# EAGLE board LoRaBaseStation1.2 Mk1 Schematic v55 (EAGLE 9.7.0)
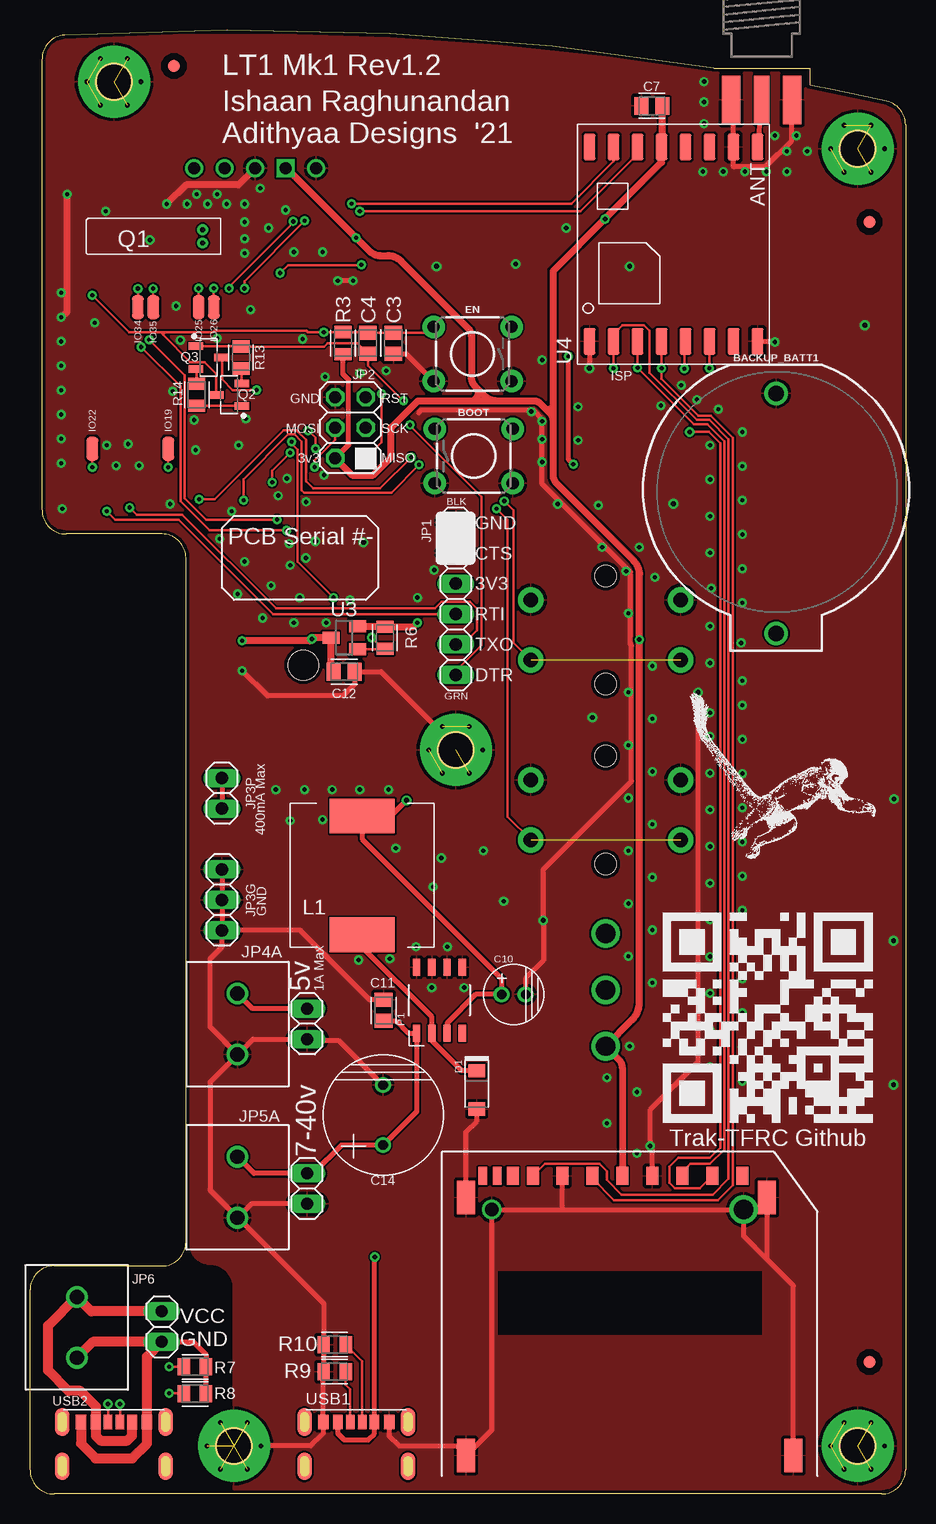
[diagram p0: board, top side]
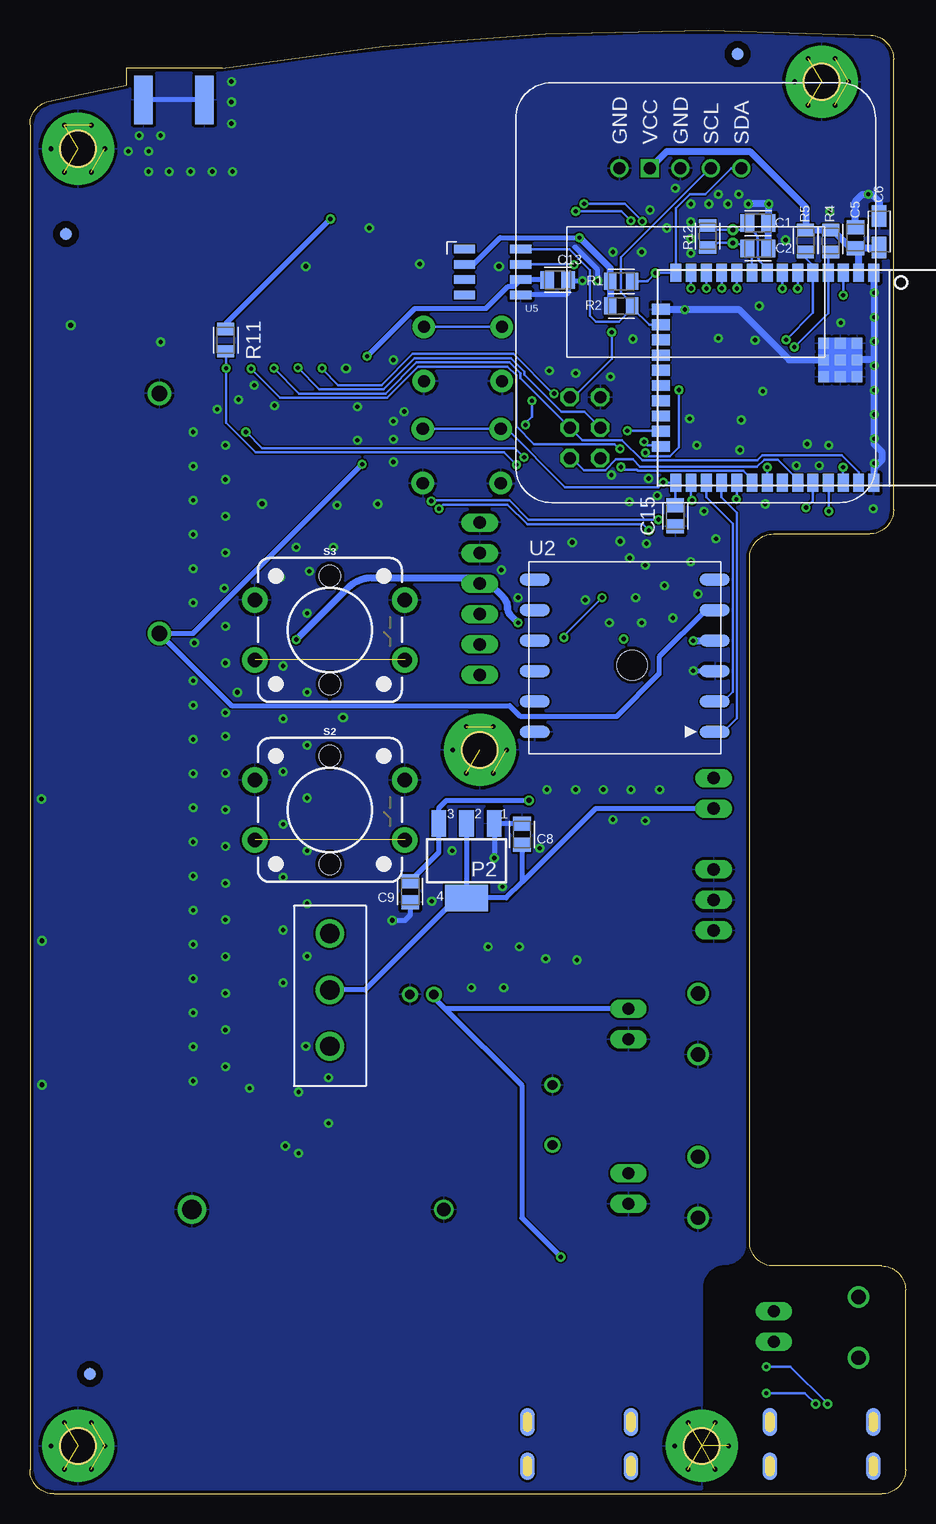
[diagram p1: board, bottom side, seen from below]

Size 73 x 122 mm. Coordinates in mm from the lower left corner, seen from the top.
Outline: 0,2 arc90 2,0 71,0 arc90 73,2 73,114.1 arc77 71.44,116.05 arc2 65,117.4 65,118.83 57,118.83 arc13 2.88,121.57 arc87 1,119.57 1,82 arc90 3,80 11,80 arc-90 13,78 13,21 arc-90 11,19 2,19 arc90 0,17 0,2
Outline: circle at 69,4 radius 1.5
Outline: circle at 17,4 radius 1.5
Outline: circle at 35.5,62 radius 1.5
Outline: circle at 69,112.1 radius 1.5
Outline: circle at 7,117.68 radius 1.5
Copper layers (1*16): Top 0.035mm / dielectric 1.5mm / Bottom 0.035mm
Design rules "PCBPower": minimum track width 6mil, minimum drill 0.35mm, track to track 6mil, track to pad 6mil, pad to pad 6mil, via to via 6mil, smd to smd 6mil, copper to edge 12mil, drill to drill 12mil, minimum pad ring 10mil, minimum via ring 8mil, stop-mask expansion 4mil, vias tented up to drill 0.4mm, thermal gap 10mil
Net classes: 1 Power: width 0.4 mm

## Footprints (pad centres in the part's own frame; a part is rotated, then mirrored left to right if it is on the bottom)
BATTCOM_20MM_PTH = drill 1.3: 1 11.85,0; 2 -8.15,0
TACTILE_SWITCH_PTH_6.0MM = drill 1.016 pad 1.88: 1 -3.251,2.261; 2 3.251,2.261; 3 -3.251,-2.261; 4 3.251,-2.261
CAPC2012X110 = smd 1.165 x 1.465: 1 -0.875,0; 2 0.875,0
CAPM3216X180 = smd 1.796 x 1.189: 1 -1.31,0; 2 1.31,0
CAP_2P_5X11 = drill 0.8: 1 -1,0; 2 1,0
CAP_5P_10X12.5 = drill 0.8: 1 -2.5,0; 2 2.5,0
SODFL3718X115 = smd 1.115 x 1.361: 1 -1.6,0; 2 1.6,0
FIDUCIAL_1MM = smd 1 x 1: 1 0,0
BREAKOUT_PAD*1*1X2MM = smd 2 x 1: P$1 0,0
1X06 = drill 1.016 long: 1 -6.35,0; 2 -3.81,0; 3 -1.27,0; 4 1.27,0; 5 3.81,0; 6 6.35,0
2X03 = drill 1.016 octagon: 1 -2.54,-1.27; 2 -2.54,1.27; 3 0,-1.27; 4 0,1.27; 5 2.54,-1.27; 6 2.54,1.27
1X03 = drill 1.016 long: 1 -2.54,0; 2 0,0; 3 2.54,0
1X02 = drill 1.016 long: 1 -1.27,0; 2 1.27,0
TERMBLK_508-2N = drill 1.2: 1 0,0; 2 5.08,0
INDUCTOR_12X12MM = smd 5.4 x 2.9: P$1 0,4.95; P$2 0,-4.95
MOUNTING_HOLE_3MM = drill 3 pad 6: P1 0,0 | drill 0.4: P2 2.25,0; P3 1.125,-1.948; P4 1.125,1.948; P5 -1.124,-1.948; P6 -2.248,0; P7 -1.124,1.948
OLED_0.96_I2C(NOMOUNT) = drill 1: P1 -1.27,4.87; P3 1.27,4.87; P4 3.81,4.87; P9 -6.35,4.87 | drill 1 square: P2 -3.81,4.87
XL1509_SOIC8 = smd 1.4 x 0.6: P1 -2.75,1.905; P2 -2.75,0.635; P3 -2.75,-0.635; P4 -2.75,-1.905; P5 2.75,-1.905; P6 2.75,-0.635; P7 2.75,0.635; P8 2.75,1.905
SOT223 = smd 1.219 x 2.235: 1 -2.311,-3.099; 2 0,-3.099; 3 2.311,-3.099 | smd 3.6 x 2.2: 4 0,3.099
YT-38(RTC_CRYSTAL) = drill 0.4 pad 0.813: 1 0,-0.55; 2 0,0.55
SOT95P237X112-3N = smd 1.224 x 0.625: 1 -1.064,0.95; 2 -1.064,-0.95; 3 1.064,0
RESC2012X65 = smd 1.031 x 1.42: 1 -0.919,0; 2 0.919,0
1P2T_SLIDE_SWITCH = drill 1.6: P1 0,4.7; P2 0,0; P3 0,-4.7
TACTILE_SWITCH_PTH_12MM = drill 1.2 pad 2.159: 1 6.25,-2.5; 2 -6.25,-2.5; 3 6.25,2.5; 4 -6.25,2.5 | hole 1.8: 0,4.5; 0,-4.5
SD_CARD_SOCKET-794212 = smd 0.7 x 1.5: CD -11.05,0; WP -12.25,0 | smd 1 x 1.5: P1 6.875,0; P2 4.375,0; P3 1.875,0; P4 -0.625,0; P5 -3.125,0; P6 -5.625,0; P7 -8.05,0; P8 -9.75,0; P9 9.375,0 | smd 1.5 x 2.8: P12 -13.65,-23.3; P15 11.45,-1.8; P16 -13.65,-1.8; P17 13.65,-23.3 | drill 1.6 pad 2: P13 9.5,-2.8 | drill 1.1 pad 1.5: P14 -11.5,-2.8
SMA_EDGELAUNCH = smd 4.064 x 1.524: GND@1 2.032,-2.54; GND@2 2.032,2.54 | smd 4.064 x 1.524 bottom: GND@3 2.032,2.54; GND@4 2.032,-2.54 | smd 4.064 x 1.27: P 2.032,0
ESP32-WROOM-32E = smd 1.5 x 0.9: P1 -8.75,5.26; P2 -8.75,3.99; P3 -8.75,2.72; P4 -8.75,1.45; P5 -8.75,0.18; P6 -8.75,-1.09; P7 -8.75,-2.36; P8 -8.75,-3.63; P9 -8.75,-4.9; P10 -8.75,-6.17; P11 -8.75,-7.44; P12 -8.75,-8.71; P13 -8.75,-9.98; P14 -8.75,-11.25; P25 8.75,-11.25; P26 8.75,-9.98; P27 8.75,-8.71; P28 8.75,-7.44; P29 8.75,-6.17; P30 8.75,-4.9; P31 8.75,-3.63; P32 8.75,-2.36; P33 8.75,-1.09; P34 8.75,0.18; P35 8.75,1.45; P36 8.75,2.72; P37 8.75,3.99; P38 8.75,5.26 | smd 0.9 x 1.5: P15 -5.715,-12.5; P16 -4.445,-12.5; P17 -3.175,-12.5; P18 -1.905,-12.5; P19 -0.635,-12.5; P20 0.635,-12.5; P21 1.905,-12.5; P22 3.175,-12.5; P23 4.445,-12.5; P24 5.715,-12.5 | smd 0.9 x 0.9: P39 -2.9,3.86; P40 -1.5,3.86; P41 -0.1,3.86; P42 -2.9,2.46; P43 -1.5,2.46; P44 -0.1,2.46; P45 -2.9,1.06; P46 -1.5,1.06; P47 -0.1,1.06
L80_PACKAGE = smd 2.5 x 1: 1 15.5,1.8; 2 15.5,4.34; 3 15.5,6.88; 4 15.5,9.42; 5 15.5,11.96; 6 15.5,14.5; 7 0.5,14.5; 8 0.5,11.96; 9 0.5,9.42; 10 0.5,6.88; 11 0.5,4.34; 12 0.5,1.8 | hole 2.5: 8.6,7.37
SOT23 = smd 1 x 1.4: 1 -0.95,-1.1; 2 0.95,-1.1; 3 0,1.1
LORA_RFM95W-915S2_16MODULE = smd 2.2 x 1: P1 -8.1,7; P2 -8.1,5; P3 -8.1,3; P4 -8.1,1; P5 -8.1,-1; P6 -8.1,-3; P7 -8.1,-5; P8 -8.1,-7; P9 8.1,-7; P10 8.1,-5; P11 8.1,-3; P12 8.1,-1; P13 8.1,1; P14 8.1,3; P15 8.1,5; P16 8.1,7
DS3231MZ+_SOIC8 = smd 1.78 x 0.72: P1 -2.34,1.905; P2 -2.34,0.635; P3 -2.34,-0.635; P4 -2.34,-1.905; P5 2.34,-1.905; P6 2.34,-0.635; P7 2.34,0.635; P8 2.34,1.905
USB-C_POWER_SUN5463 = smd 0.7 x 1.2: CC1 -0.5,0; CC2 0.5,0 | smd 0.9 x 1.2: GND1 -2.75,0; GND2 2.75,0 | smd 1.2 x 2.3 bottom: P1 4.32,0; P2 4.32,-3.7; P3 -4.32,0; P4 -4.32,-3.7 | smd 1.2 x 2.3: P5 4.32,0; P6 4.32,-3.7; P7 -4.32,0; P8 -4.32,-3.7 | smd 0.8 x 1.2: VBUS1 -1.52,0; VBUS2 1.52,0

## Placement (x,y rotation side)
A1  [SQUIRREL_MONKE]  63.18,57.21 0 top
BACKUP_BATT1  [BATTCOM_20MM_PTH]  62.21,83.57 270 top
BOOT  MOMENTARY-SWITCH-SPST-PTH-6.0MM  [TACTILE_SWITCH_PTH_6.0MM]  37,86.5 0 top
C1  15pF  [CAPC2012X110]  12.3,105.9 180 bottom
C2  15pF  [CAPC2012X110]  12.3,103.8 180 bottom
C3  0.1uF  [CAPC2012X110]  30.3,95.9 270 top
C4  0.1uF  [CAPC2012X110]  28.18,95.9 270 top
C5  0.1uF  [CAPC2012X110]  4.18,104.7 90 bottom
C6  10uF  [CAPM3216X180]  2.2,105.2 90 bottom
C7  0.1uF  [CAPC2012X110]  51.85,115.68 180 top
C8  10uF  [CAPC2012X110]  31.98,54.96 270 bottom
C9  10uF  [CAPC2012X110]  41.3,50.2 270 bottom
C10  100uF  [CAP_2P_5X11]  40.32,41.63 0 top
C11  1uF  [CAPC2012X110]  29.48,40.3 90 top
C12  1uF  [CAPC2012X110]  26.2,68.52 0 top
C13  1uF  [CAPC2012X110]  29,101.17 0 bottom
C14  470uF  [CAP_5P_10X12.5]  29.44,31.58 90 top
C15  0.1uF  [CAPC2012X110]  19.2,81.5 90 bottom
D1  [SODFL3718X115]  37.25,33.67 270 top
EN  MOMENTARY-SWITCH-SPST-PTH-6.0MM  [TACTILE_SWITCH_PTH_6.0MM]  36.9,95 180 top
F1  FIDUCIAL  [FIDUCIAL_1MM]  12,119 0 top
F2  FIDUCIAL  [FIDUCIAL_1MM]  70,106 0 top
F3  FIDUCIAL  [FIDUCIAL_1MM]  70,11 0 top
F4  FIDUCIAL  [FIDUCIAL_1MM]  68,10 0 bottom
F5  FIDUCIAL  [FIDUCIAL_1MM]  14,120 0 bottom
F6  FIDUCIAL  [FIDUCIAL_1MM]  70,105 0 bottom
IO19  BREAKOUT_PADL  [BREAKOUT_PAD*1*1X2MM]  11.53,87.1 90 top
IO22  BREAKOUT_PADL  [BREAKOUT_PAD*1*1X2MM]  5.2,87.1 90 top
IO25  BREAKOUT_PADL  [BREAKOUT_PAD*1*1X2MM]  14.07,98.9 90 top
IO26  BREAKOUT_PADL  [BREAKOUT_PAD*1*1X2MM]  15.33,98.9 90 top
IO34  BREAKOUT_PADL  [BREAKOUT_PAD*1*1X2MM]  9,98.9 90 top
IO35  BREAKOUT_PADL  [BREAKOUT_PAD*1*1X2MM]  10.28,98.9 90 top
JP1  PINHD-1X6  [1X06]  35.5,74.6 90 top
JP2  PINHD-2X3  [2X03]  26.72,88.86 90 top
JP3G  PINHD-1X3  [1X03]  16,49.5 270 top
JP3P  PINHD-1X2  [1X02]  16,58.39 270 top
JP4  PINHD-1X2  [1X02]  23.1,39.17 270 top
JP4A  2828XX-2282837-2  [TERMBLK_508-2N]  17.3,41.7 270 top
JP5  PINHD-1X2  [1X02]  23.1,25.45 270 top
JP5A  2828XX-2282837-2  [TERMBLK_508-2N]  17.3,28.1 270 top
JP6  2828XX-2282837-2  [TERMBLK_508-2N]  3.9,11.35 90 top
JP6A  PINHD-1X2  [1X02]  10.98,13.95 90 top
L1  68uh  [INDUCTOR_12X12MM]  27.69,51.55 180 top
M1  MOUNTING_HOLES  [MOUNTING_HOLE_3MM]  17,4 0 top
M2  MOUNTING_HOLES  [MOUNTING_HOLE_3MM]  69,4 0 top
M3  MOUNTING_HOLES  [MOUNTING_HOLE_3MM]  35.5,62 0 top
M4  MOUNTING_HOLES  [MOUNTING_HOLE_3MM]  7,117.68 0 top
M5  MOUNTING_HOLES  [MOUNTING_HOLE_3MM]  69,112.1 0 top
OLED1  0.96_OLED_I2CNOMOUNT  [OLED_0.96_I2C(NOMOUNT)]  17.5,105.61 0 bottom
P1  XL1509  [XL1509_SOIC8]  34.14,41.15 90 top
P2  LDO-LM11173.3MP  [SOT223]  36.6,52.77 180 bottom
Q1  32.768khz  [YT-38(RTC_CRYSTAL)]  14.4,104.8 0 top
Q2  MMBT2222AL  [SOT95P237X112-3N]  16.6,91.6 180 top
Q3  MMBT2222AL  [SOT95P237X112-3N]  14.9,94.7 0 top
R1  4.7k  [RESC2012X65]  23.7,101.05 0 bottom
R2  4.7k  [RESC2012X65]  23.7,99 0 bottom
R3  10k  [RESC2012X65]  26.1,95.9 90 top
R4  10k  [RESC2012X65]  6.25,104.41 270 bottom
R5  10k  [RESC2012X65]  8.34,104.42 270 bottom
R6  10k  [RESC2012X65]  29.6,71.35 270 top
R7  5.1k  [RESC2012X65]  13.76,10.59 0 top
R8  5.1k  [RESC2012X65]  13.76,8.34 0 top
R9  5.1k  [RESC2012X65]  25.4,10.19 0 top
R10  5.1k  [RESC2012X65]  25.4,12.44 0 top
R11  10k  [RESC2012X65]  56.68,96.15 270 bottom
R12  5.1M  [RESC2012X65]  16.5,104.8 270 bottom
R13  10k  [RESC2012X65]  17.6,94.7 270 top
R14  10k  [RESC2012X65]  13.9,91.6 90 top
S1  1P2T_SLIDE_SWITCH  [1P2T_SLIDE_SWITCH]  48,42 0 bottom
S2  MOMENTARY-SWITCH-SPST-PTH-12MM  [TACTILE_SWITCH_PTH_12MM]  48,57 0 bottom
S3  MOMENTARY-SWITCH-SPST-PTH-12MM  [TACTILE_SWITCH_PTH_12MM]  48,72 0 bottom
SD  SD_SOCKETSD_FULL  [SD_CARD_SOCKET-794212]  50,26.5 0 top
SMA  [SMA_EDGELAUNCH]  61,118.2 270 top
U1  ESP32-WROOM-32E  [ESP32-WROOM-32E]  7.9,93 270 bottom
U2  L80_GNSS_MODULE  [L80_PACKAGE]  31.4,61.7 0 bottom
U3  PMOSFET  [SOT23]  26.2,71.35 90 top
U4  LORA_RFM95W-915S2_MODULE  [LORA_RFM95W-915S2_16MODULE]  53.66,104.15 90 top
U5  DS3231MZ+  [DS3231MZ+_SOIC8]  34.43,101.83 0 bottom
U$1  [TRAKGIT]  51.6,29.7 0 top
USB1  USB-C_POWER_SUN5463  [USB-C_POWER_SUN5463]  27.2,6 0 top
USB2  USB-C_POWER_SUN5463  [USB-C_POWER_SUN5463]  7,6 0 top

## Library data of the parts
A1 F1-F6 IO19 IO22 IO25 IO26 IO34 IO35 M1-M5 OLED1 SMA U1 U2 U$1 USB1 USB2 = CDC Library
BACKUP_BATT1 = CDC Library; LINK: https://www.evelta.com/3v-litium-battery-holder/; PROD_ID: BATT-09031; SF_SKU: PRT-00783
BOOT EN = CDC Library; LINK: https://www.sunrom.com/p/tactile-switch-6x6x43mm; PROD_ID: SWCH-08441; SF_SKU: COM-00097
C1 C2 = Capacitor; CATEGORY: Capacitor; LINK: https://www.sunrom.com/p/15pf-150-0805-2012-metric
C3-C5 C7 C15 = Capacitor; CATEGORY: Capacitor; LINK: https://www.sunrom.com/p/100nf-104-smd-0805-pack-of-20
C6 = Capacitor; CATEGORY: Capacitor; LINK: https://www.sunrom.com/p/10uf-25v-tantalum
C8 C9 = Capacitor; CATEGORY: Capacitor; LINK: https://www.sunrom.com/p/10uf-106-smd-0805-pack-of-10
C10 = CDC Library; LINK: https://www.evelta.com/100uf-25v-electrolytic-capacitor/
C11-C13 = Capacitor; CATEGORY: Capacitor; LINK: https://www.sunrom.com/p/1uf-105-smd-0805-pack-of-10
C14 = CDC Library; LINK: https://www.evelta.com/470uf-25v-electrolytic-capacitor/
D1 = CDC Library; LINK: https://www.sunrom.com/p/1n5819-b5819w-1n5819w-s4-sod123-1206-1a-40v-schottky-diode
JP1 JP2 JP3G JP3P JP4 JP5 JP6A = Connector; CATEGORY: CONNECTOR; SUB-CATEGORY: PIN-HEADER
JP4A JP5A JP6 = Connector; CATEGORY: Connector; DESCRIPTION: 2 Position Wire to Board Terminal Block Horizontal with Board 5.08 mm Through Hole; MANUFACTURER: TE Connectivity; MPN: 282837-2; OPERATING_TEMPERATURE: -40°C to +105°C; PART_STATUS: ACTIVE; ROHS_COMPLIANCE: RoHS Compliant; SERIES: 282837; SUBCATEGORY: Terminal Block; TYPE: Side Wire Entry
L1 = CDC Library; LINK: https://www.sunrom.com/p/68uh-680-12mm-inductor
P1 = CDC Library; LINK: https://www.sunrom.com/m/6161
P2 = CDC Library; LINK: https://www.sunrom.com/m/4004; MF: Texas Instruments; MPN: LM1117MP-3.3; OC_FARNELL: 9778195; OC_NEWARK: 28X3416
Q1 = CDC Library; CATEGORY: Crystals; DESCRIPTION: Crystals 32.768 KHz 2X6; FREQUENCY: 32.768 kHz; LINK: https://www.sunrom.com/p/32768-khz-rtc-crystal-t38; MANUFACTURER: Fox Electronics; MPN: NC26LF-327; OPERATING_TEMPERATURE: -20C To 60C; ROHS_COMPLIANT: YES; SERIES: NCLF; TOLERANCE: 20 PPM; TYPE: Crystal
Q2 Q3 = Transistor; CATEGORY: Transistor; DESCRIPTION: TRANS NPN 40V 0.6A SOT23; LINK: https://www.evelta.com/mmbt2222alt1g-40v-600ma-npn-bipolar-silicon-transistor-3-pin-sot-23/; MANUFACTURER: ON Semiconductor; SUB-CATEGORY: BJT; TYPE: NPN
R1 R2 = Resistor; CATEGORY: Resistor; LINK: https://www.sunrom.com/p/4k7-1-0805-pack-of-100; SUB-CATEGORY: Fixed
R3-R6 R11 R13 R14 = Resistor; CATEGORY: Resistor; LINK: https://www.sunrom.com/p/10k-1-0805-pack-of-100; SUB-CATEGORY: Fixed
R7-R10 = Resistor; CATEGORY: Resistor; LINK: https://www.evelta.com/5k1-5-0805-smd-resistor-royal-ohm-0805W8J0512T5E/; SUB-CATEGORY: Fixed
R12 = Resistor; CATEGORY: Resistor; LINK: https://www.sunrom.com/p/5m1-1-0805; SUB-CATEGORY: Fixed
S1 = CDC Library; LINK: https://www.sunrom.com/p/slide-switch-1p2t-high-current-straight
S2 S3 = CDC Library; LINK: https://www.sunrom.com/p/tactile-switch-square-head-omron-b3f-4055-12x12x73mm; PROD_ID: SWCH-09185; SF_SKU: COM-09190
SD = CDC Library; LINK: https://www.sunrom.com/p/full-sd-card-socket
U3 = Transistor; CATEGORY: Transistor; LINK1: https://www.sunrom.com/p/ao3401-a19t-sot-23-p-ch-mosfet; SUB-CATEGORY: MOSFET; TYPE: P-Channel
U4 = CDC Library; LINK: https://www.digikey.in/product-detail/en/rf-solutions/RFM95W-915S2/RFM95W-915S2-ND/6564923
U5 = CDC Library; LINK: https://www.evelta.com/ds3231mz-maxim-integrated-alarm-rtc-i2c-2-3-v-to-5-5-v/

## Nets
3.3V_GPS [Power]: C12.1 U2.4 U3.3
5V [Power]: C9.1 C10.1 JP4.1 JP4A.1 L1.P$2 P1.P3 P2.3 USB1.VBUS1 USB1.VBUS2
+3.3V [Power]: C5.1 C6.1 C7.1 JP1.4 JP2.2 OLED1.P2 R1.1 R2.1 R3.1 R4.1 R5.1 R6.1 R11.1 S1.P3 SD.P4 U1.P2 U3.2 U4.P13 U5.P2
AMSVO [Power]: C8.2 JP3P.1 JP3P.2 P2.2 P2.4 S1.P2
CC1: R9.2 USB1.CC1
CC2: R10.2 USB1.CC2
CS_LR: U1.P23 U4.P5
CS_SD: SD.P1 U1.P29
DTR: C4.2 JP1.1 Q3.1 R13.1
DTRAR: Q2.2 R13.2
EN: C3.1 C4.1 EN.3 EN.4 JP2.5 Q2.3 R3.2 U1.P3
GND [Power]: BACKUP_BATT1.2 BOOT.3 BOOT.4 C1.1 C2.1 C3.2 C5.2 C6.2 C7.2 C8.1 C9.2 C10.2 C11.2 C12.2 C13.2 C14.2 C15.1 D1.2 EN.1 EN.2 JP1.5 JP1.6 JP2.6 JP3G.1 JP3G.2 JP3G.3 JP4.2 JP4A.2 JP5.2 JP5A.2 M1.P1 M1.P2 M1.P3 M1.P4 M1.P5 M1.P6 M1.P7 M2.P1 M2.P2 M2.P3 M2.P4 M2.P5 M2.P6 M2.P7 M3.P1 M3.P2 M3.P3 M3.P4 M3.P5 M3.P6 M3.P7 M4.P1 M4.P2 M4.P3 M4.P4 M4.P5 M4.P6 M4.P7 M5.P1 M5.P2 M5.P3 M5.P4 M5.P5 M5.P6 M5.P7 OLED1.P1 OLED1.P9 P1.P5 P1.P6 P1.P7 P1.P8 P2.1 R9.1 R10.1 S2.3 S2.4 S3.3 S3.4 SD.P3 SD.P6 SD.P12 SD.P13 SD.P14 SD.P15 SD.P16 SD.P17 SMA.GND@1 SMA.GND@2 SMA.GND@3 SMA.GND@4 U1.P1 U1.P15 U1.P38 U1.P39 U1.P40 U1.P41 U1.P42 U1.P43 U1.P44 U1.P45 U1.P46 U1.P47 U2.3 U2.12 U4.P1 U4.P8 U4.P10 U5.P5 USB1.GND1 USB1.GND2
GPS_POWER: R6.2 U1.P24 U3.1
INT0: U1.P13 U4.P14
INT1: U1.P12 U4.P15
IO0: BOOT.1 BOOT.2 C15.2 Q3.3 U1.P25
IO19: IO19.P$1 U1.P31
IO22: IO22.P$1 U1.P36
IO25: IO25.P$1 U1.P10
IO26: IO26.P$1 U1.P11
IO34: IO34.P$1 U1.P6
IO35: IO35.P$1 U1.P7
MISO: JP2.1 SD.P7 U1.P33 U4.P2
MOSI: JP2.4 SD.P2 U1.P30 U4.P3
Q1: C1.2 Q1.2 R12.1 U1.P8
Q2: C2.2 Q1.1 R12.2 U1.P9
RESET_LR: R11.2 U1.P26 U4.P6
RTC_BATT [Power]: BACKUP_BATT1.1 C13.1 U2.5 U5.P6
RTS: Q2.1 R14.1
RTSAR: Q3.2 R14.2
RX_GPS: U1.P28 U2.1
RXD: JP1.3 U1.P35
S_CC1: R7.1 USB2.CC1
S_CC2: R8.1 USB2.CC2
S_GND [Power]: JP6.1 JP6A.1 R7.2 R8.2 USB2.GND1 USB2.GND2
S_VCC [Power]: JP6.2 JP6A.2 USB2.VBUS1 USB2.VBUS2
SCK: JP2.3 SD.P5 U1.P37 U4.P4
SCL: OLED1.P3 R2.2 U1.P16 U5.P8
SDA: OLED1.P4 R1.2 U1.P14 U5.P7
SMA-ANT [RF]: SMA.P U4.P9
SW2: R4.2 S2.1 S2.2 U1.P4
SW3: R5.2 S3.1 S3.2 U1.P5
TX_GPS: U1.P27 U2.2
TXD: JP1.2 U1.P34
VIN [Power]: C11.1 C14.1 JP5.1 JP5A.1 P1.P1
XLVO [Power]: D1.1 L1.P$1 P1.P2

## Tracks (layer width: path | path; a pad name or v marks a point on that pad's centre or on a via)
3.3V_GPS  (via drill 0.35)
  Top 0.6: C12.1 25.1,68.75 U3.3 23.6,71.35 v23.5,71.25 23.35,71.1 v17.7,71.1
  Bottom 0.6: v17.7,71.1 17.68,71.12 U2.4
5V  (via drill 0.35, 0.4)
  Top 0.4: JP4.1 18.55,40.45 JP4A.1 | v31.4,57.8 30.1,56.5 L1.P$2 27.69,54.57 39.32,42.94 C10.1 37.16,41.63 34.78,39.25 P1.P3 | USB1.VBUS1 25.68,5.02 26.2,4.5 28.2,4.5 28.72,5.02 USB1.VBUS2 28.72,19.72 v28.75,19.75
  Bottom 0.4: JP4.1 38.41,40.45 | v31.4,57.8 38.28,57.8 38.91,57.17 P2.3 38.91,53.46 C9.1 | 38.41,40.45 32,34.04 32,23 v28.75,19.75 | 38.41,40.45 39.32,41.36 C10.1
+3.3V  (via drill 0.35)
  Top 0.4: R3.1 26.1,93.33 26.56,92.87 26.56,87.43 JP2.2
  Top 0.6: C7.1 52.73,112.31 U4.P13 52.66,110.96 v47.95,106.25 43.61,101.91 43.61,90.6 | SD.P4 49.38,35.54 arc45 49.1,36.2 S1.P3 50.2,39.5 arc45 50.8,40.95 v50.8,71.2 50.8,76.57 arc45 50.26,77.86 43.89,84.24 arc-45 43.61,84.9 43.61,89.4 | OLED1.P2 21.41,110.48 v27.2,104.69 28.33,103.56 arc45 29.2,103.2 29.83,103.2 arc-45 30.94,102.74 36.54,97.14 arc-45 36.8,96.51 36.8,93.1 arc45 37.14,92.28 37.41,92.01 | 43.61,90.6 43.61,89.8 | 43.61,89.8 43.61,89.4 | 43.06,90.36 42.54,90.88 arc45 42,91.1 38.9,91.1 | 43.33,90.08 43.61,89.8 | 37.41,92.01 37.91,91.51 | 37.91,91.51 38.32,91.1 | 38.32,91.1 38.9,91.1 | v32.3,72.6 31.97,72.27 R6.1 29.57,72.3 U3.2 | JP2.2 26.86,84.91 28.59,84.91 30.1,86.41 30.1,88.86 32.34,91.1 37,91.1 | 37,91.1 38.32,91.1 | 37.91,91.51 arc45 38.9,91.1 | 37.41,92.01 arc-45 37.06,91.16 37,91.1 | 43.33,90.08 43.06,90.36 | 43.33,90.08 arc-45 43.61,89.4 | 43.06,90.36 arc45 43.59,90.58 43.61,90.6
  Bottom 0.4: v47.95,106.25 56.68,97.52 R11.1 | U5.P2 36.03,102.47 33.8,104.69 27.16,104.69
  Bottom 0.6: U1.P2 3.91,103.56 C5.1 | C6.1 2.26,103.83 C5.1 | C5.1 4.54,103.83 6.05,105.33 R4.1 8.33,105.33 | 8.33,105.33 R5.1 | OLED1.P2 19.91,111.88 12.98,111.88 8.33,107.23 8.33,105.33 | R2.1 R1.1 24.62,102.15 27.16,104.69 v27.2,104.69 | v50.8,71.2 46.48,75.52 arc45 44.52,76.33 35.96,76.33 JP1.4 34.7,75.87 33.54,74.71 arc45 33.2,73.9 arc-45 32.92,73.22 v32.3,72.6
AMSVO
  Top 0.4: JP3P.1 JP3P.2
  Bottom 0.4: P2.4 33.3,49.67 31.98,50.99 | P2.4 37.4,49.67 45.07,42 S1.P2 | P2.2 P2.4 | JP3P.2 25.85,57.12 31.98,50.99 | C8.2 31.98,50.99
CC1
  Top 0.2: R9.2 26.32,9.09 26.7,8.71 USB1.CC1
CC2
  Top 0.2: USB1.CC2 27.7,11.06 R10.2
CS_LR  (via drill 0.35)
  Top 0.2: U4.P5 54.56,95.95 v54.56,93.76 | v23.8,87.1 23.8,88 v23.2,88.6
  Bottom 0.2: v54.56,93.76 52.15,91.35 43.22,91.35 40.63,93.95 33.17,93.95 32.46,93.23 32.46,88.96 30.97,87.47 24.27,87.47 23.9,87.1 v23.8,87.1 | v23.2,88.6 20.73,88.6 20.69,88.56 U1.P23
CS_SD  (via drill 0.35)
  Top 0.2: v31.8,86.4 29.2,83.8 23.61,83.8 23,84.41 23,86.19 23.02,86.21 23.02,87.85 22.21,88.66 21.16,88.66 15.4,82.9 v14.1,82.9 | v55,88.5 56.59,88.5 57.54,87.55 57.54,28.84 56.7,28 54.07,28 53.32,27.25 53.32,25.95 53.77,25.5 55.87,25.5 SD.P1
  Bottom 0.2: U1.P29 14.07,82.93 v14.1,82.9 | v31.8,86.4 32.55,87.15 53.65,87.15 v55,88.5
DTR  (via drill 0.35)
  Top 0.2: Q3.1 17.57,95.65 R13.1 22.46,95.62 24.52,95.62 24.8,95.9 27.3,95.9 C4.2 28.18,94.03 31.11,91.09 v31.15,91.09 | JP1.1 35.5,68.59 37.63,70.72 37.63,83.09 31.82,88.91 31.82,88.95 v31.69,89.08
  Bottom 0.2: v31.69,89.08 31.69,89.26 31.16,89.78 31.16,91.08 v31.15,91.09
DTRAR
  Top 0.2: Q2.2 17.66,93.72 R13.2
EN  (via drill 0.35)
  Top 0.2: 10.9,96.82 8.28,96.82 v5.2,99.9 | 10.9,96.82 11.3,96.82 | Q2.3 15.54,93.36 14.57,94.33 13.37,94.33 11.1,96.6 | 11.1,96.6 10.9,96.8 10.9,96.82 | 11.1,96.6 11.1,96.62 11.3,96.82 | EN.4 33.16,96.78 C3.1 C4.1 28.14,96.82 R3.2 v24.5,96.82 23.16,96.82 23.05,96.93 15.34,96.93 15.23,96.82 11.3,96.82
  Bottom 0.2: U1.P3 5.18,99.92 v5.2,99.9 | v24.5,96.82 24.5,94.6 27.7,91.4 JP2.5 | EN.3 EN.4
GND  (via drill 0.35, 0.4)  (20 unrouted)
  Top 0.4: JP5.2 18.46,24.18 JP5A.2 | JP5A.2 17.34,23.02 24.48,15.88 R10.1 R9.1 24.45,10.16 USB1.GND1 24.45,5.04 23.41,4 M1.P2 | JP4A.2 18.59,37.91 JP4.2 23.2,37.8 25.71,37.8 C14.2 | JP4A.2 15,34.32 15,25.32 JP5A.2 | JP4A.2 15,38.92 15,44.6 16,45.6 JP3G.3 | JP3G.1 JP3G.2 JP3G.3 | SD.P16 36.35,30.17 37.25,31.07 D1.2 | 44.4,23.7 SD.P14 38.5,5.35 SD.P12 35.55,4 30.8,4 29.95,4.85 USB1.GND2 | 44.4,23.7 SD.P13 59.5,21.5 61.45,19.55 | SD.P17 63.65,17.35 61.45,19.55 | SD.P15 61.45,19.55 | SD.P6 44.38,23.73 44.4,23.7 | C11.2 28.32,41.17 22.54,46.96 JP3G.3 | SD.P3 51.88,28.82 v51.7,29 51.7,32 55.68,35.98 55.68,66.78 v55.7,66.8 | C10.2 41.32,42.97 42.8,44.45 v42.8,47.8 42.8,52.05 50.15,59.4 50.15,70.72 50.07,70.8 50.07,76.83 42.7,84.2 v42.7,86 v42.7,87.9 v42.7,89.4 42.7,89.6 42,90.3 32.6,90.3 32.4,90.1 | SMA.GND@4 58.66,115.97 U4.P10 58.66,110.64 58.7,110.6 61.33,110.6 63.5,112.77 63.5,116.13 SMA.GND@3 | U4.P1 v46.66,93.81 v46.65,93.8 | C3.2 31.36,95.03 EN.2 | v17.7,68.6 19.8,66.5 26.12,66.5 27.07,67.46 C12.2 29.28,68.52 33.85,63.95 M3.P7 | JP1.5 JP1.6 | v26.93,101.1 v25.67,101.1
  Top 0.406: U4.P8 62.05,96.05 v62.1,96
  Top 0.6: v2.6,98.07 3.1,98.53 v3.1,108.3 | OLED1.P1 17.39,109.1 13,109.1 v11.4,107.5
  Bottom 0.4: C8.1 34.25,55.84 P2.1 34.29,53.01 v34.3,53 | C9.2 41.3,48.22 41.72,47.8 v42.8,47.8 | SMA.GND@4 SMA.GND@3 | v17.7,68.6 15.92,68.6 U2.3 | U5.P5 28.27,99.92 28.12,100.08 C13.2 28.05,101.1 v26.93,101.1 | v25.67,101.1 25.67,102 27.58,103.92
  Bottom 0.6: U1.P1 v2.6,98.07 2.64,94.5 | 2.64,94.5 4.1,94.5 | 4.1,94.5 U1.P43 6.8,94.5 | U1.P15 13.91,98.72 9.7,94.5 6.8,94.5 | C5.2 4.18,107.72 3.6,108.3 v3.1,108.3 2.8,108.3 2.2,107.7 C6.2 | C2.1 C1.1 11.43,106 11.4,106.03 v11.4,107.5 v13.1,107.5 | U1.P40 U1.P39 U1.P42 U1.P45 6.84,94.54 6.8,94.5 | U1.P46 U1.P47 U1.P44 U1.P41 4.04,94.44 4.1,94.5 | 2.64,94.5 2.64,87.52 1.97,86.84 1.97,86.16 2.64,85.48 U1.P38
  other vias: 46.9,64.7 44.7,105.5 50,102.3 69.6,97.4 27.8,79.3 23.8,79.4 40.5,102.5 72,34.1 72,46.1 72.05,57.92 53.64,82.52 14.8,107.5 16.4,107.5 17.9,107.5 17.9,106 17.9,104.6 13.9,108.3 15.6,108.3 17.9,103.4 24.53,84.92 23.03,82.67 33.9,102.3 19.9,105.5 22,103.5 21.3,107 19.2,108.8 6.3,106.9 5.4,97.6 8.2,87.5 11.9,91.9 9.1,85.7 7.2,85.7 6.4,87.4 2.6,87.93 2.7,82.1 12.2,99 13.7,89.5 13.8,87 17.4,87.4 18,89.6 18.4,98.7 10,104.5 45.7,90.6 45.7,87.8 52.6,90.7 54.3,92.4 55.6,91.2 57.4,90.4 59.39,88.5 56.7,87.4 59.39,85.65 56.7,84.54 56.7,81.48 56.7,78.43 56.8,75.47 56.7,72.31 59.29,70.92 59.39,74.27 59.39,77.11 59.39,79.96 59.39,82.81 56.7,69.25 59.39,67.77 56.7,65.09 59.39,65.73 56.7,63.13 59.39,62.88 59.39,60.03 56.7,60.08 56.7,57.02 59.39,57.18 59.39,54.34 56.7,53.96 59.39,51.49 56.7,50.9 59.39,48.64 59.39,34.41 56.7,35.61 59.39,37.26 56.7,38.67 56.7,41.73 59.39,40.1 59.39,42.95 56.7,44.78 59.39,45.8 56.7,47.84 54.68,33.81 42.7,94.5 41.8,90.2 15.8,79.6 17.9,77.7 20.1,75.7 22.5,74.7 21.6,79.2 21.7,77.4 21.42,84.62 20.7,83.2 16.8,81.9 2.6,100.1 2.6,96.04 2.6,94.01 2.6,91.99 2.6,89.96 2.6,85.9 64.8,111.9 56.2,114.2 56.2,116 56.2,117.7 11.7,82.5 23,78 26.7,74.5 33.7,77 32.3,74.7 22,72.6 19.4,73 17.3,75 24.7,72.6 20.5,58.7 21.7,56.1 24.4,56.2 22.9,58.7 25.2,58.7 27.5,58.7 29.9,58.7 30.5,53.8 33.6,50.6 39.5,49.4 37.8,53.6 24.4,103.5 12.54,96.16 15.6,96.3 22.72,96.25 24.6,93.1 27.5,93.4 29.7,93.6 56.1,110.2 57.8,110.2 59.6,110.2 61.4,110.2 63.1,110.2 63.1,111.9 62.1,113.2 63.9,113.2 44,82.5 47.4,82.4 50.8,78.9 47.7,78.9 49.7,76.9 52.1,76.4 49.9,73.4 51.9,69 49.9,66.8 51.9,64.6 49.9,62.4 51.9,60.2 49.9,58 51.9,55.8 49.9,53.6 51.9,51.4 51.9,47 49.9,49.2 49.9,44.8 51.9,42.6 50,37.3 48.1,34.7 50.6,33.5 48.1,30.9 50.6,28.4 27.4,44.5 30,44.6 33.5,42.2 36.2,42.2 34.8,45.6 32.2,45.6
  pour Bottom: 15,0 71,0 arc90 73,2 73,114 arc90 65,122 3.4,122 arc90 0.9,119.5 0.9,82 arc90 2.9,80 11,80 arc-90 13,78 13,2 arc90
  pour Top: 14.8,0 71.4,0 arc90 73.1,1.7 73.1,113.7 arc90 65.1,121.7 3.5,121.7 arc90 1,119.2 1,81.7 arc90 3,79.7 11.1,79.7 arc-90 13.1,77.7 13.1,1.7 arc90
GPS_POWER  (via drill 0.35)
  Top 0.2: U3.1 29.57,70.4 R6.2 29.4,70.43 28.47,71.36 v28.47,71.37 | v25.3,74.7 22.3,77.7 22.3,86.49 22.31,86.5 22.31,87.03 21.8,87.54 v21.8,87.67
  Bottom 0.2: v25.3,74.7 28.47,71.53 v28.47,71.37 | v21.8,87.67 21.52,87.39 20.51,87.39 U1.P24
INT0  (via drill 0.35)
  Top 0.2: v22.9,106.1 17.88,101.08 v17.88,100.46 | U4.P14 50.66,111.65 45.91,106.9 v27.5,106.9
  Bottom 0.2: U1.P13 v17.88,100.46 | v27.5,106.9 23.7,106.9 v22.9,106.1
INT1  (via drill 0.35)
  Top 0.2: v16.61,100.46 16.61,100.61 21.95,105.95 v21.95,106.05 | v26.8,107.53 45.14,107.53 48.66,111.05 U4.P15
  Bottom 0.2: U1.P12 v16.61,100.46 | v21.95,106.05 23.41,107.5 26.77,107.5 v26.8,107.53
IO0  (via drill 0.35)
  Top 0.2: Q3.3 16,94.7 16,92.9 16.91,91.98 18.38,91.98 18.39,92 v18.9,92 | v21.68,86.76 20.2,85.28 v20.2,84.3
  Bottom 0.2: C15.2 19.2,84.2 U1.P25 20.15,84.25 v20.2,84.3 20.6,83.9 28.39,83.9 33.25,88.76 BOOT.1 BOOT.2 | v18.9,92 18.9,87.23 19.64,86.48 21.55,86.48 21.66,86.59 21.66,86.75 v21.68,86.76
IO19  (via drill 0.35)
  Top 0.2: IO19.P$1 v11.53,85.57
  Bottom 0.2: U1.P31 v11.53,85.57
IO22  (via drill 0.35)
  Top 0.2: IO22.P$1 v5.2,85.58 v5.21,85.57
  Bottom 0.2: v5.21,85.57 5.21,84.28 U1.P36
IO25  (via drill 0.35)
  Top 0.2: v14.07,100.46 IO25.P$1
  Bottom 0.2: U1.P10 v14.07,100.46
IO26  (via drill 0.35)
  Top 0.2: IO26.P$1 v15.33,100.47
  Bottom 0.2: v15.33,100.47 U1.P11
IO34  (via drill 0.35)
  Top 0.2: v9,100.45 IO34.P$1
  Bottom 0.2: U1.P6 v9,100.45
IO35  (via drill 0.35)
  Top 0.2: IO35.P$1 v10.28,100.45
  Bottom 0.2: v10.28,100.45 10.28,101.73 U1.P7
MISO  (via drill 0.35)
  Top 0.2: SD.P7 42.95,27.5 47.48,27.5 48.1,26.88 48.1,26.17 49.32,24.95 56.93,24.95 58.25,26.27 58.25,87.89 56.63,89.5 55.59,89.5 51.66,93.44 51.66,96.93 51.19,97.4 49.41,97.4 48.66,96.65 U4.P2 v48.66,93.81 v48.65,93.8 | v29.3,91.7 29.3,87.63 JP2.1
  Bottom 0.2: U1.P33 8.99,84.54 10.65,86.2 11.79,86.2 12.38,85.62 22.16,85.62 22.75,86.21 24.13,86.21 25.03,85.31 26.81,85.31 27.82,86.32 JP2.1 | v48.65,93.8 48.65,93.76 47.3,92.41 43.68,92.41 41.09,95 32.71,95 29.4,91.7 v29.3,91.7
MOSI  (via drill 0.35)
  Top 0.2: SD.P2 54.38,26.81 55.07,27.5 56.7,27.5 57.9,28.7 57.9,87.75 56.49,89.15 55.35,89.15 v50.66,93.84 U4.P3 | v23.73,85.58 23.73,86.14 25.45,87.86 JP2.4
  Bottom 0.2: U1.P30 12.8,84.54 13.53,85.26 22.3,85.26 22.4,85.36 23.66,85.36 23.73,85.43 v23.73,85.58 | JP2.4 26.78,90.19 28.68,90.19 31.75,93.26 31.75,93.53 32.88,94.65 40.92,94.65 43.52,92.06 48.88,92.06 v50.66,93.84
Q1
  Bottom 0.2: U1.P8 arc-45 11.8,102.4 12.1,102.7 arc45 12.3,103.18 12.3,104.4 arc-45 12.6,105.12 13.18,105.7 C1.2 13.18,105.4 arc45 13.12,105.35 Q1.2 15.61,105.35 arc45 R12.1
Q2
  Bottom 0.2: U1.P9 12.8,102.89 arc-45 C2.2 13.27,103.8 arc-45 14.36,104.25 Q1.1 15.61,104.25 arc-45 R12.2
RESET_LR  (via drill 0.35)
  Top 0.2: v32.44,85.76 30.13,83.45 22.85,83.45 22.65,83.65 22.65,86.34 22.66,86.36 22.66,87.7 22.06,88.3 21.54,88.3 17.8,84.56 v17.8,82.8 | U4.P6 v56.66,93.81 v56.65,93.8
  Bottom 0.2: U1.P26 17.88,82.88 v17.8,82.8 | v32.44,85.76 33.48,86.8 54.19,86.8 56.65,89.26 v56.65,93.8 56.65,95.2 R11.2
RTC_BATT  (via drill 0.35)
  Top 0.4: v45.3,85.8 44.9,86.2 v44.9,94.8
  Bottom 0.4: U2.5 16.65,73.66 20.54,69.77 20.54,68.34 24.1,64.79 32.1,64.79 33.02,65.7 56.2,65.7 BACKUP_BATT1.1 59.38,71.72 v45.3,85.8 | C13.1 32.06,101.17 U5.P6 32.65,100.64 33.13,100.64 34.96,98.8 40.9,98.8 v44.9,94.8
RTS
  Top 0.2: R14.1 17.63,90.68 Q2.1
RTSAR
  Top 0.2: Q3.2 13.9,93.69 R14.2
RX_GPS
  Bottom 0.2: U2.1 15.2,63.5 14.04,64.66 14.04,81.75 15.34,83.05 U1.P28
RXD  (via drill 0.35)
  Top 0.2: v6.4,81.9 7.09,81.2 12.41,81.2 20.28,73.33 JP1.3
  Bottom 0.2: v6.4,81.9 6.4,84.2 U1.P35
S_CC1  (via drill 0.35)
  Top 0.2: USB2.CC1 v6.5,7.5 | R7.1 v11.61,10.59 v11.6,10.6
  Bottom 0.2: v11.6,10.6 9.6,10.6 v6.5,7.5
S_CC2  (via drill 0.35)
  Top 0.2: USB2.CC2 v7.5,7.5 | v11.6,8.4 12.78,8.4 R8.1
  Bottom 0.2: v7.5,7.5 8.4,8.4 v11.6,8.4
S_GND
  Top 0.4: R8.2 R7.2 14.68,11.59 13.59,12.68 JP6A.1
  Top 0.813: JP6.1 5.23,12.68 JP6A.1 9.75,11.45 USB2.GND2 9.75,4.2 8.52,2.97 5.48,2.97 4.25,4.2 USB2.GND1
S_VCC
  Top 0.813: JP6A.2 5.11,15.22 JP6.2 1.5,14.03 1.5,10.3 3.21,8.59 4.19,8.59 5.48,7.31 USB2.VBUS1 5.48,4.84 5.88,4.44 8.12,4.44 8.52,4.84 USB2.VBUS2
SCK  (via drill 0.35)
  Top 0.2: U4.P4 v52.66,93.8 52.66,92.94 55.74,89.86 56.78,89.86 58.6,88.04 58.6,25.72 57.37,24.49 48.68,24.49 46.88,26.3 SD.P5
  Bottom 0.2: v52.66,93.8 50.56,91.7 43.37,91.7 40.77,94.3 33.02,94.3 32.1,93.38 32.1,92.97 JP2.3 26.95,87.82 23.63,87.82 21.94,86.13 12.36,86.13 11.94,86.55 5.3,86.55 3.91,85.16 U1.P37
SCL
  Bottom 0.2: U1.P16 21.37,97.44 22.75,98.83 22.75,98.97 R2.2 | R2.2 22.78,99.16 23.75,100.13 23.75,103.04 16.31,110.48 OLED1.P3 | U5.P8 28.04,103.73 26.3,102 26.3,98.2 25.8,97.7 23.9,97.7 22.78,98.82 R2.2
SDA  (via drill 0.35)
  Top 0.2: v20.85,101.75 21.5,102.4 27.6,102.4 v27.63,102.43
  Bottom 0.2: R1.2 21.62,101.05 arc-45 21.5,101.1 v20.85,101.75 U1.P14 19.15,107.14 17.99,108.3 16.7,108.3 14.52,110.48 OLED1.P4 | U5.P7 27.7,102.47 27.66,102.43 v27.63,102.43
SMA-ANT
  Top 0.4: SMA.P U4.P9
SW2  (via drill 0.35)  (1 unrouted)
  Top 0.2: v9.28,95.58 12.56,92.3 12.56,82.71 14.98,80.29 v21.4,80.29 | S2.1 39.8,56.45 39.8,81.2 v38.9,82.1
  Bottom 0.2: R4.2 6.45,103.29 U1.P4 6.45,98.41 v9.28,95.58 | v21.4,80.29 21.9,80.79 31.52,80.79 33.18,82.45 38.55,82.45 v38.9,82.1
SW3  (via drill 0.35)  (1 unrouted)
  Top 0.2: S3.1 40.3,70.95 40.3,81.98 v39.54,82.74 | v20.6,81.2 14.7,81.2 12.91,82.99 12.91,93.24 v9.96,96.19
  Bottom 0.2: R5.2 8.34,103 7.82,102.48 7.82,101.85 U1.P5 7.72,98.42 v9.96,96.19 | v20.6,81.2 31.43,81.2 33.04,82.81 39.48,82.81 v39.54,82.74
TX_GPS
  Bottom 0.2: U2.2 15.2,66.04 14.4,66.84 14.4,80.84 16.61,83.05 U1.P27
TXD  (via drill 0.35)
  Top 0.2: v8.3,82.2 8.9,81.6 12.7,81.6 20.5,73.8 33.77,73.8 34.32,74.34 36.68,74.34 37.28,73.75 37.28,71.97 36.1,70.79 JP1.2
  Bottom 0.2: U1.P34 7.72,82.78 v8.3,82.2
VIN
  Top 0.4: JP5A.1 18.68,26.72 JP5.1 23.6,26.72 25.96,29.08 C14.1 29.44,29.06 32.24,31.86 P1.P1 31.54,38.4 30.51,39.42 C11.1
XLVO
  Top 0.4: L1.P$1 27.69,45.57 33.51,39.76 P1.P2 33.51,37.77 36.01,35.27 D1.1
(copper drawn outside any net)
  shapes: Bottom area x1, Top area x1

## Text on the board
tPlace: LT1 Mk1 Rev1.2 | Ishaan Raghunandan / Adithyaa Designs '21 | ISP | GND / MOSI / 3v3 | RST / SCK / MISO | PCB Serial #- | 400mA Max | GND | 5v | 1A Max | Trak-TFRC Github | 7-40v | VCC / GND
tNames: BLK | GND / CTS / 3V3 / RTI / TXO / DTR | GRN